# EAGLE board medidor-2 (EAGLE 9.5.2)
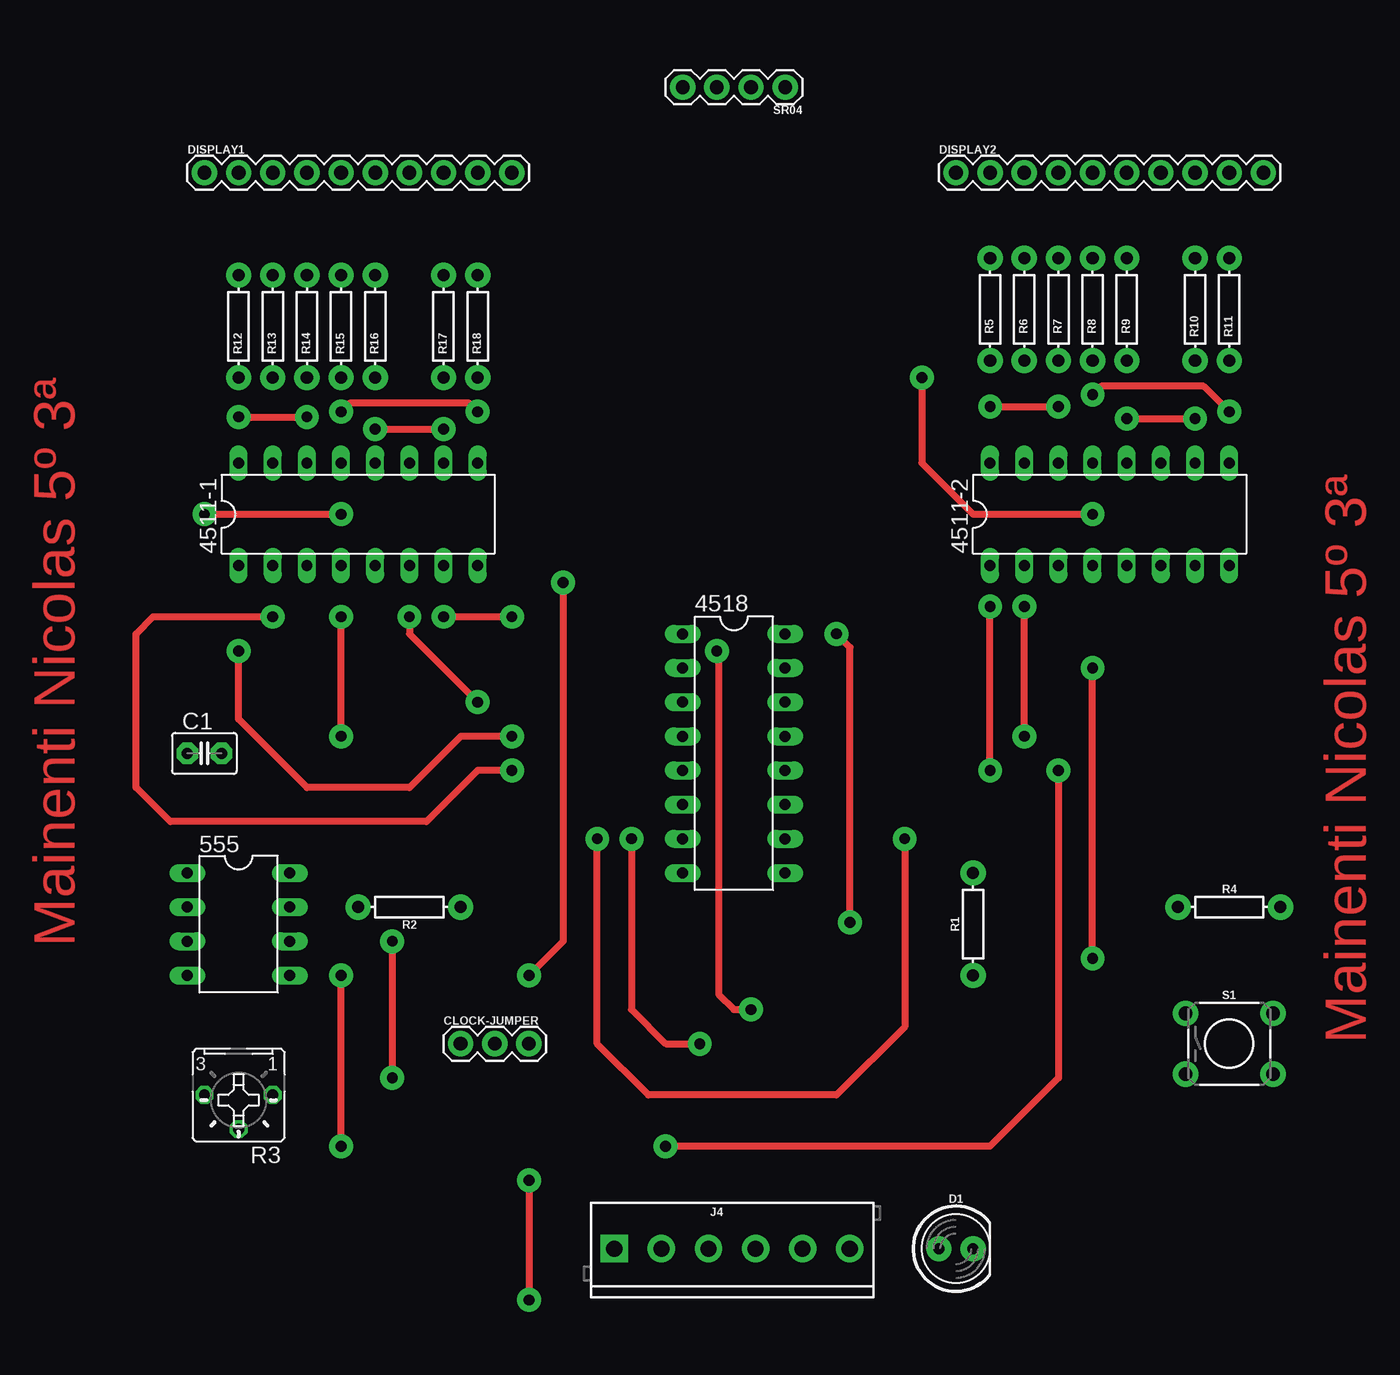
[diagram p0: board, top side]
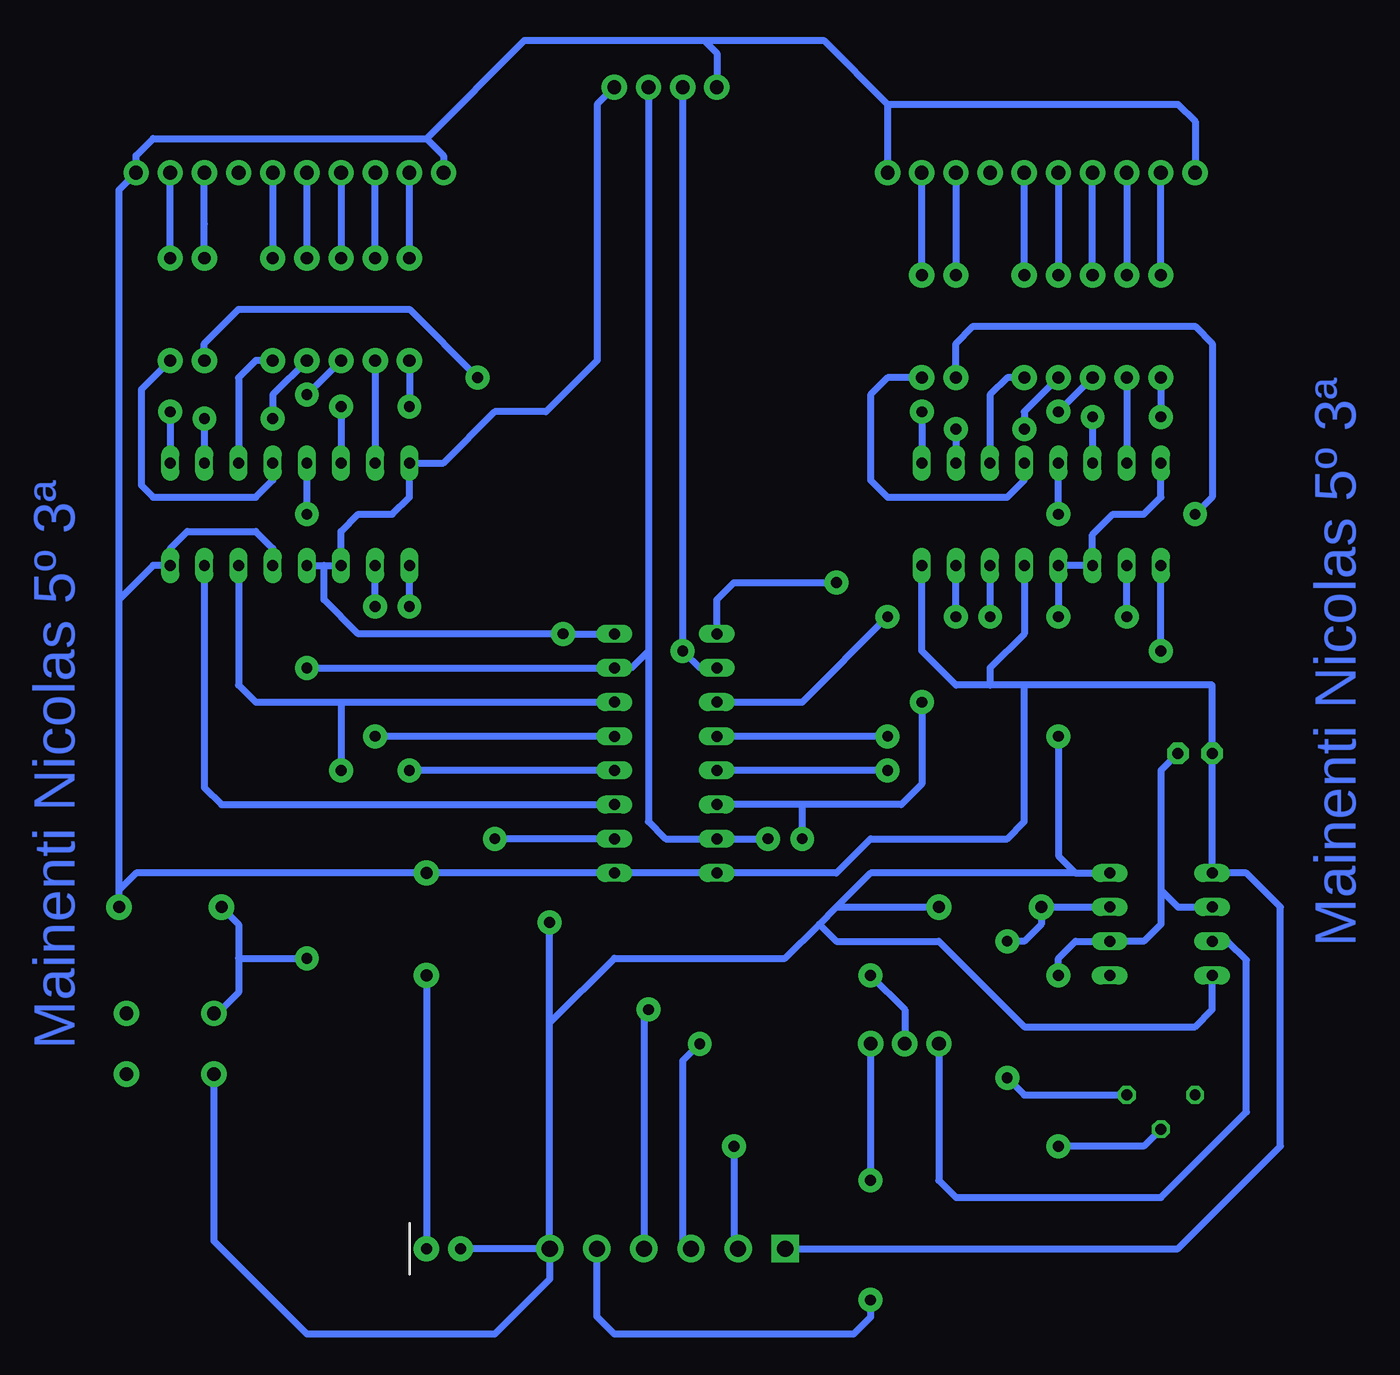
[diagram p1: board, bottom side, seen from below]

No outline drawn. Coordinates in mm, seen from the top.
Copper layers (1*16): Top 0.035mm / dielectric 1.5mm / Bottom 0.035mm
Design rules "default": minimum track width 6mil, minimum drill 0.35mm, track to track 6mil, track to pad 6mil, pad to pad 6mil, via to via 6mil, smd to smd 6mil, copper to edge 40mil, drill to drill 6mil, minimum pad ring 10mil, minimum via ring 8mil, stop-mask expansion 4mil, vias tented up to drill 0mil, thermal gap 10mil

## Footprints (pad centres in the part's own frame; a part is rotated, then mirrored left to right if it is on the bottom)
DIL08 = drill 0.813 long: 1 -3.81,-3.81; 2 -1.27,-3.81; 3 1.27,-3.81; 4 3.81,-3.81; 5 3.81,3.81; 6 1.27,3.81; 7 -1.27,3.81; 8 -3.81,3.81
DIL16 = drill 0.813 long: 1 -8.89,-3.81; 2 -6.35,-3.81; 3 -3.81,-3.81; 4 -1.27,-3.81; 5 1.27,-3.81; 6 3.81,-3.81; 7 6.35,-3.81; 8 8.89,-3.81; 9 8.89,3.81; 10 6.35,3.81; 11 3.81,3.81; 12 1.27,3.81; 13 -1.27,3.81; 14 -3.81,3.81; 15 -6.35,3.81; 16 -8.89,3.81
C2.5-3 = drill 0.813 pad 1.6 octagon: 1 -1.27,0; 2 1.27,0
1X03 = drill 1.016 pad 1.88: 1 0,0; 2 2.54,0; 3 5.08,0
LED_5MM = drill 0.813 pad 1.88: A -1.27,0; K 1.27,0
1X10 = drill 1.016 pad 1.88: 1 0,0; 2 2.54,0; 3 5.08,0; 4 7.62,0; 5 10.16,0; 6 12.7,0; 7 15.24,0; 8 17.78,0; 9 20.32,0; 10 22.86,0
SCREWTERMINAL-3.5MM-6 = drill 1.2 pad 2.032 square: 1 0,0 | drill 1.2 pad 2.032: 2 3.5,0; 3 7,0; 4 10.5,0; 5 14,0; 6 17.5,0
AXIAL-0.3 = drill 0.9 pad 1.88: P$1 -3.81,0; P$2 3.81,0
B25P = drill 0.813 octagon: A -2.54,0; E 2.54,0; S 0,2.54
TACTILE_SWITCH_PTH_6.0MM = drill 1.016 pad 1.88: 1 -3.251,2.261; 2 3.251,2.261; 3 -3.251,-2.261; 4 3.251,-2.261
1X04 = drill 1.016 pad 1.88: 1 0,0; 2 2.54,0; 3 5.08,0; 4 7.62,0

## Placement (x,y rotation side)
555  [DIL08]  43.18,33.02 270 top
4511-1  [DIL16]  52.07,63.5 0 top
4511-2  [DIL16]  107.95,63.5 0 top
4518  [DIL16]  80.01,45.72 270 top
C1  23nF  [C2.5-3]  40.64,45.72 0 top
CLOCK-JUMPER  455-1750-1-ND  [1X03]  59.69,24.13 0 top
D1  [LED_5MM]  96.52,8.89 0 top
DISPLAY1  [1X10]  40.64,88.9 0 top
DISPLAY2  [1X10]  96.52,88.9 0 top
J4  [SCREWTERMINAL-3.5MM-6]  71.12,8.89 0 top
R1  330  [AXIAL-0.3]  97.79,33.02 90 top
R2  2.2k  [AXIAL-0.3]  55.88,34.29 180 top
R3  5k  [B25P]  43.18,20.32 180 top
R4  10k  [AXIAL-0.3]  116.84,34.29 0 top
R5  330  [AXIAL-0.3]  99.06,78.74 90 top
R6  330  [AXIAL-0.3]  101.6,78.74 90 top
R7  330  [AXIAL-0.3]  104.14,78.74 90 top
R8  330  [AXIAL-0.3]  106.68,78.74 90 top
R9  330  [AXIAL-0.3]  109.22,78.74 90 top
R10  330  [AXIAL-0.3]  114.3,78.74 90 top
R11  330  [AXIAL-0.3]  116.84,78.74 90 top
R12  330  [AXIAL-0.3]  43.18,77.47 90 top
R13  330  [AXIAL-0.3]  45.72,77.47 90 top
R14  330  [AXIAL-0.3]  48.26,77.47 90 top
R15  330  [AXIAL-0.3]  50.8,77.47 90 top
R16  330  [AXIAL-0.3]  53.34,77.47 90 top
R17  330  [AXIAL-0.3]  58.42,77.47 90 top
R18  330  [AXIAL-0.3]  60.96,77.47 90 top
S1  MOMENTARY-SWITCH-SPST-PTH-6.0MM  [TACTILE_SWITCH_PTH_6.0MM]  116.84,24.13 0 top
SR04  [1X04]  83.82,95.25 180 top

## Library data of the parts
555 4511-1 4511-2 4518 = ic-package
C1 = capacitor-wima
CLOCK-JUMPER = SparkFun-Connectors; PROD_ID: XXX-00000
D1 = SparkFun-LED
DISPLAY1 DISPLAY2 = SparkFun-Connectors; PROD_ID: CONN-11563
J4 = SparkFun-Connectors
R1 R2 R4-R18 = SparkFun-Resistors; PROD_ID: RES-09435
R3 = pot
S1 = SparkFun-Switches; PROD_ID: SWCH-08441; SF_SKU: COM-00097
SR04 = SparkFun-Connectors; PROD_ID: CONN-09696

## Nets
1-A: 4511-1.7 4518.3
1-B: 4511-1.1 4518.4
1-C: 4511-1.2 4518.5
1-D: 4511-1.6 4518.6 4518.10
2-A: 4511-2.7 4518.11
2-B: 4511-2.1 4518.12
2-C: 4511-2.2 4518.13
2-D: 4511-2.6 4518.14 J4.2
5V: 555.4 555.8 4511-1.3 4511-1.4 4511-1.16 4511-2.3 4511-2.4 4511-2.16 4518.16 D1.A J4.6 R2.P$1 S1.3 SR04.1
CLOCK-555: 555.3 CLOCK-JUMPER.1
CLOCK-A: 4518.1 CLOCK-JUMPER.2
CLOCK-EXT: CLOCK-JUMPER.3 J4.5
D1-A: 4511-1.13 R17.P$1
D1-B: 4511-1.12 R18.P$1
D1-C: 4511-1.11 R16.P$1
D1-D: 4511-1.10 R15.P$1
D1-E: 4511-1.9 R14.P$1
D1-F: 4511-1.15 R13.P$1
D1-G: 4511-1.14 R12.P$1
D2-A: 4511-2.13 R10.P$1
D2-B: 4511-2.12 R11.P$1
D2-C: 4511-2.11 R9.P$1
D2-D: 4511-2.10 R8.P$1
D2-E: 4511-2.9 R7.P$1
D2-F: 4511-2.15 R6.P$1
D2-G: 4511-2.14 R5.P$1
ENABLE-A: 4518.2 J4.4 SR04.3
GND: 555.1 4511-1.5 4511-1.8 4511-2.5 4511-2.8 4518.8 4518.9 C1.1 DISPLAY1.1 DISPLAY1.10 DISPLAY2.1 DISPLAY2.10 J4.1 R1.P$2 R4.P$2 SR04.4
N$1: D1.K R1.P$1
N$2: DISPLAY1.2 R12.P$2
N$3: 555.7 R2.P$2 R3.A
N$5: 555.2 555.6 C1.2 R3.S
N$6: DISPLAY1.3 R13.P$2
N$7: DISPLAY1.4 R14.P$2
N$8: DISPLAY1.5 R15.P$2
N$9: DISPLAY1.6 R16.P$2
N$10: DISPLAY1.8 R17.P$2
N$11: DISPLAY1.9 R18.P$2
N$12: DISPLAY2.2 R5.P$2
N$13: DISPLAY2.3 R6.P$2
N$14: DISPLAY2.4 R7.P$2
N$15: DISPLAY2.5 R8.P$2
N$16: DISPLAY2.6 R9.P$2
N$17: DISPLAY2.8 R10.P$2
N$18: DISPLAY2.9 R11.P$2
RESET-A-B: 4518.7 4518.15 J4.3 R4.P$1 S1.1 SR04.2

## Tracks (layer width: path | path; a pad name or v marks a point on that pad's centre or on a via)
1-A  (via drill 0.8 pad 1.78)
  Top 0.508: v58.42,55.88 v63.5,55.88
  Bottom 0.508: 4518.3 69.85,49.53 v63.5,55.88 | v58.42,55.88 4511-1.7
1-B  (via drill 0.8 pad 1.78)
  Top 0.508: v63.5,46.99 59.69,46.99 55.88,43.18 48.26,43.18 43.18,48.26 v43.18,53.34
  Bottom 0.508: v43.18,53.34 4511-1.1 | v63.5,46.99 4518.4
1-C  (via drill 0.8 pad 1.78)
  Top 0.508: v63.5,44.45 60.96,44.45 57.15,40.64 38.1,40.64 35.56,43.18 35.56,54.61 36.83,55.88 v45.72,55.88
  Bottom 0.508: v45.72,55.88 4511-1.2 | v63.5,44.45 4518.5
1-D  (via drill 0.8 pad 1.78)
  Top 0.508: v55.88,55.88 55.88,54.61 v60.96,49.53 | v92.71,39.37 92.71,25.4 87.63,20.32 73.66,20.32 69.85,24.13 v69.85,39.37
  Bottom 0.508: 4511-1.6 v55.88,55.88 | v60.96,49.53 60.96,43.43 62.48,41.91 69.85,41.91 | 69.85,41.91 4518.6 | 4518.10 v92.71,39.37 | v69.85,39.37 69.85,41.91
2-A
  Bottom 0.508: 4511-2.7 114.3,43.18 113.03,41.91 4518.11
2-B  (via drill 0.8 pad 1.78)
  Top 0.508: v99.06,44.45 v99.06,56.64
  Bottom 0.508: 4518.12 v99.06,44.45 | v99.06,56.64 4511-2.1
2-C  (via drill 0.8 pad 1.78)
  Top 0.508: v101.6,46.99 v101.6,56.64
  Bottom 0.508: 4518.13 v101.6,46.99 | v101.6,56.64 4511-2.2
2-D  (via drill 0.8 pad 1.78)
  Top 0.508: v104.14,44.45 104.14,21.59 99.06,16.51 v74.93,16.51
  Bottom 0.508: 4511-2.6 111.76,50.8 110.49,49.53 104.14,49.53 | 104.14,49.53 4518.14 | 104.14,49.53 v104.14,44.45 | v74.93,16.51 74.93,9.2 J4.2
5V  (via drill 0.8 pad 1.78)
  Top 0.508: v88.65,33.15 88.65,53.59 v87.63,54.61 | v50.8,46.99 v50.8,55.88
  Bottom 0.508: J4.6 D1.A | J4.6 88.62,6.63 92.71,2.54 106.68,2.54 113.59,9.45 S1.3 | J4.6 88.62,25.68 | 88.62,25.68 83.82,30.48 71.12,30.48 68.58,33.02 | 68.58,33.02 67.31,34.29 | 67.31,34.29 R2.P$1 | 67.31,34.29 64.77,36.83 49.53,36.83 | 49.53,36.83 555.8 | 68.58,33.02 67.31,31.75 59.69,31.75 53.34,25.4 40.64,25.4 39.37,26.67 555.4 | v50.8,55.88 4511-1.4 4511-1.3 48.26,61.98 46.74,63.5 44.45,63.5 43.18,64.77 4511-1.16 | v50.8,46.99 50.8,38.1 49.53,36.83 | 88.62,25.68 88.65,25.71 v88.65,33.15 | 4518.16 v87.63,54.61 102.87,54.61 105.41,57.15 105.41,59.69 | 4511-2.4 105.41,59.69 | 105.41,59.69 4511-2.3 104.14,62.23 102.87,63.5 100.33,63.5 99.06,64.77 4511-2.16 96.52,67.31 92.71,71.12 88.9,71.12 85.09,74.93 85.09,93.98 SR04.1
CLOCK-555
  Bottom 0.508: CLOCK-JUMPER.1 59.69,13.97 58.42,12.7 43.18,12.7 36.83,19.05 36.83,30.35 38.23,31.75 555.3
CLOCK-A  (via drill 0.8 pad 1.78)
  Top 0.508: v67.31,58.42 67.31,31.75 v64.77,29.21
  Bottom 0.508: 4518.1 76.2,57.15 74.93,58.42 v67.31,58.42 | v64.77,29.21 62.23,26.67 CLOCK-JUMPER.2
CLOCK-EXT  (via drill 0.8 pad 1.78)
  Top 0.508: v64.77,13.97 v64.77,5.08
  Bottom 0.508: CLOCK-JUMPER.3 v64.77,13.97 | v64.77,5.08 64.77,3.81 66.04,2.54 83.82,2.54 85.12,3.84 J4.5
D1-A  (via drill 0.8 pad 1.78)
  Top 0.508: v40.64,63.5 v50.8,63.5
  Bottom 0.508: R17.P$1 58.42,76.2 57.15,77.47 40.64,77.47 39.37,76.2 39.37,64.77 v40.64,63.5 | v50.8,63.5 4511-1.13
D1-B
  Bottom 0.508: R18.P$1 63.5,73.66 64.77,72.39 64.77,66.04 63.5,64.77 54.61,64.77 53.34,66.04 4511-1.12
D1-C
  Bottom 0.508: R16.P$1 54.61,73.66 55.88,72.39 4511-1.11
D1-D  (via drill 0.8 pad 1.78)
  Top 0.508: v53.34,69.83 v58.42,69.83
  Bottom 0.508: R15.P$1 53.34,71.12 v53.34,69.83 | v58.42,69.83 4511-1.10
D1-E  (via drill 0.8 pad 1.78)
  Top 0.508: v50.8,71.12 51.44,71.75 60.33,71.75 v60.96,71.12
  Bottom 0.508: R14.P$1 v50.8,71.12 | v60.96,71.12 4511-1.9
D1-F
  Bottom 0.508: R13.P$1 4511-1.15
D1-G  (via drill 0.8 pad 1.78)
  Top 0.508: v43.18,70.74 v48.26,70.74
  Bottom 0.508: R12.P$1 v43.18,70.74 | v48.26,70.74 4511-1.14
D2-A  (via drill 0.8 pad 1.78)
  Top 0.508: v93.98,73.66 93.98,67.31 97.79,63.5 v106.68,63.5
  Bottom 0.508: R10.P$1 114.3,76.2 111.76,78.74 99.06,78.74 v93.98,73.66 | v106.68,63.5 4511-2.13
D2-B
  Bottom 0.508: R11.P$1 119,72.77 119,65.66 118.11,64.77 110.49,64.77 109.22,66.04 4511-2.12
D2-C
  Bottom 0.508: R9.P$1 110.49,74.93 111.76,73.66 4511-2.11
D2-D  (via drill 0.8 pad 1.78)
  Top 0.508: v109.22,70.61 v114.3,70.61
  Bottom 0.508: R8.P$1 109.22,72.39 v109.22,70.61 | v114.3,70.61 4511-2.10
D2-E  (via drill 0.8 pad 1.78)
  Top 0.508: v106.68,72.39 107.31,73.03 114.94,73.03 v116.84,71.12
  Bottom 0.508: R7.P$1 v106.68,72.39 | v116.84,71.12 4511-2.9
D2-F
  Bottom 0.508: R6.P$1 4511-2.15
D2-G  (via drill 0.8 pad 1.78)
  Top 0.508: v99.06,71.5 v104.14,71.5
  Bottom 0.508: R5.P$1 v99.06,71.5 | v104.14,71.5 4511-2.14
ENABLE-A  (via drill 0.8 pad 1.78)
  Top 0.508: v78.74,53.34 78.87,53.21 78.87,27.81 80.01,26.67 v81.28,26.67
  Bottom 0.508: SR04.3 v78.74,53.34 77.47,52.07 4518.2 | v81.28,26.67 81.62,26.33 J4.4
GND
  Bottom 0.508: J4.1 41.91,8.89 34.29,16.51 34.29,34.29 36.83,36.83 555.1 C1.1 39.37,50.8 53.34,50.8 | 4511-1.8 60.96,53.34 58.42,50.8 55.88,50.8 | 53.34,50.8 55.88,50.8 | 55.88,50.8 55.88,52.07 53.34,54.61 4511-1.5 | R4.P$2 120.65,35.56 | 120.65,35.56 120.65,57.15 | 120.65,57.15 120.65,87.63 DISPLAY2.10 119.38,90.17 118.11,91.44 97.79,91.44 | 97.79,91.44 96.52,90.17 DISPLAY2.1 | 97.79,91.44 90.5,98.73 77.14,98.73 | 77.14,98.73 76.2,97.79 SR04.4 | 63.5,93.98 68.25,98.73 77.14,98.73 | 63.5,93.98 DISPLAY1.10 | DISPLAY1.1 40.64,92.71 41.91,93.98 63.5,93.98 | 120.65,57.15 118.11,59.69 4511-2.8 116.84,60.96 115.57,62.23 110.49,62.23 109.22,60.96 4511-2.5 | 120.65,35.56 119.38,36.83 R1.P$2 4518.9 4518.8 67.31,36.83 64.77,39.37 54.61,39.37 53.34,40.64 53.34,50.8
N$1
  Bottom 0.508: R1.P$1 D1.K
N$2
  Bottom 0.508: R12.P$2 DISPLAY1.2
N$3  (via drill 0.8 pad 1.78)
  Top 0.508: v54.61,31.75 v54.61,21.59
  Bottom 0.508: 555.7 R2.P$2 52.07,33.02 53.34,31.75 v54.61,31.75 | v54.61,21.59 53.34,20.32 R3.A
N$5  (via drill 0.8 pad 1.78)
  Top 0.508: v50.8,16.51 v50.8,29.21
  Bottom 0.508: C1.2 43.18,44.45 43.18,35.56 | 43.18,35.56 41.91,34.29 555.2 | 43.18,35.56 43.18,33.02 44.45,31.75 555.6 49.53,31.75 50.8,30.48 v50.8,29.21 | R3.S 44.45,16.51 v50.8,16.51
N$6
  Bottom 0.508: DISPLAY1.3 R13.P$2
N$7
  Bottom 0.508: R14.P$2 DISPLAY1.4
N$8
  Bottom 0.508: DISPLAY1.5 R15.P$2
N$9
  Bottom 0.508: R16.P$2 DISPLAY1.6
N$10
  Bottom 0.508: DISPLAY1.8 R17.P$2
N$11
  Bottom 0.508: R18.P$2 DISPLAY1.9
N$12
  Bottom 0.508: R5.P$2 DISPLAY2.2
N$13
  Bottom 0.508: R6.P$2 DISPLAY2.3
N$14
  Bottom 0.508: DISPLAY2.4 R7.P$2
N$15
  Bottom 0.508: R8.P$2 DISPLAY2.5
N$16
  Bottom 0.508: DISPLAY2.6 R9.P$2
N$17
  Bottom 0.508: R10.P$2 114.3,85.09 DISPLAY2.8
N$18
  Bottom 0.508: R11.P$2 DISPLAY2.9
RESET-A-B  (via drill 0.8 pad 1.78)
  Top 0.508: v72.39,39.37 72.39,26.67 74.93,24.13 v77.47,24.13 | v106.68,30.48 v106.68,52.07
  Bottom 0.508: R4.P$1 111.76,33.02 111.76,30.48 | 111.76,30.48 111.76,27.94 113.31,26.39 S1.1 | SR04.2 81.28,53.34 | 81.28,53.34 82.55,52.07 4518.15 v106.68,52.07 | 81.28,53.34 81.28,40.64 80.01,39.37 4518.7 v72.39,39.37 | v77.47,24.13 78.74,22.86 78.74,9.51 J4.3 | 111.76,30.48 v106.68,30.48

## Text on the board
Top: Mainenti Nicolas 5º 3ª | Mainenti Nicolas 5º 3ª
Bottom: Mainenti Nicolas 5º 3ª | Mainenti Nicolas 5º 3ª